# Altium PCB MainBoard_PCB_spaced.PcbDoc
Units mil, origin at the board's own origin, x right, y up, seen from the top; angles counter-clockwise.
Board outline 4850 x 3150 mil, 2 copper layers (Top Layer, Bottom Layer); 20 components, 32 nets, 91 pads, 0 vias.
Unrouted connection lines stored in the file: 2.
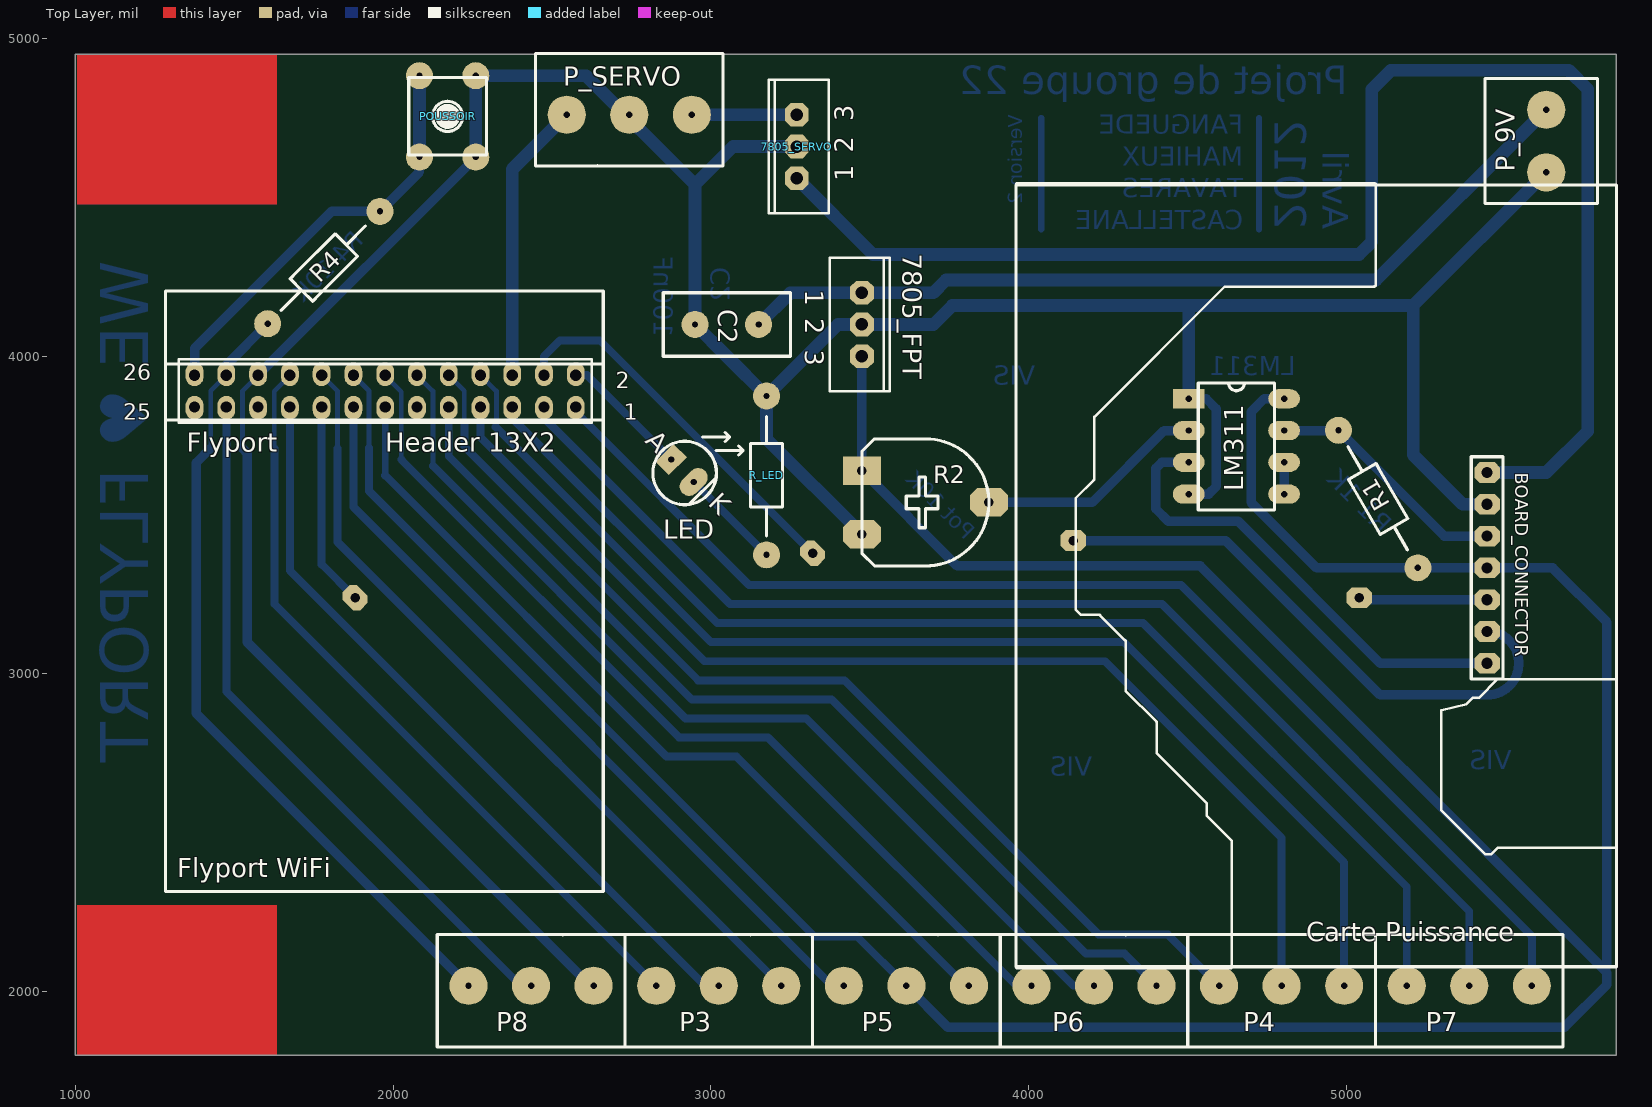
[diagram p0: Top Layer view]
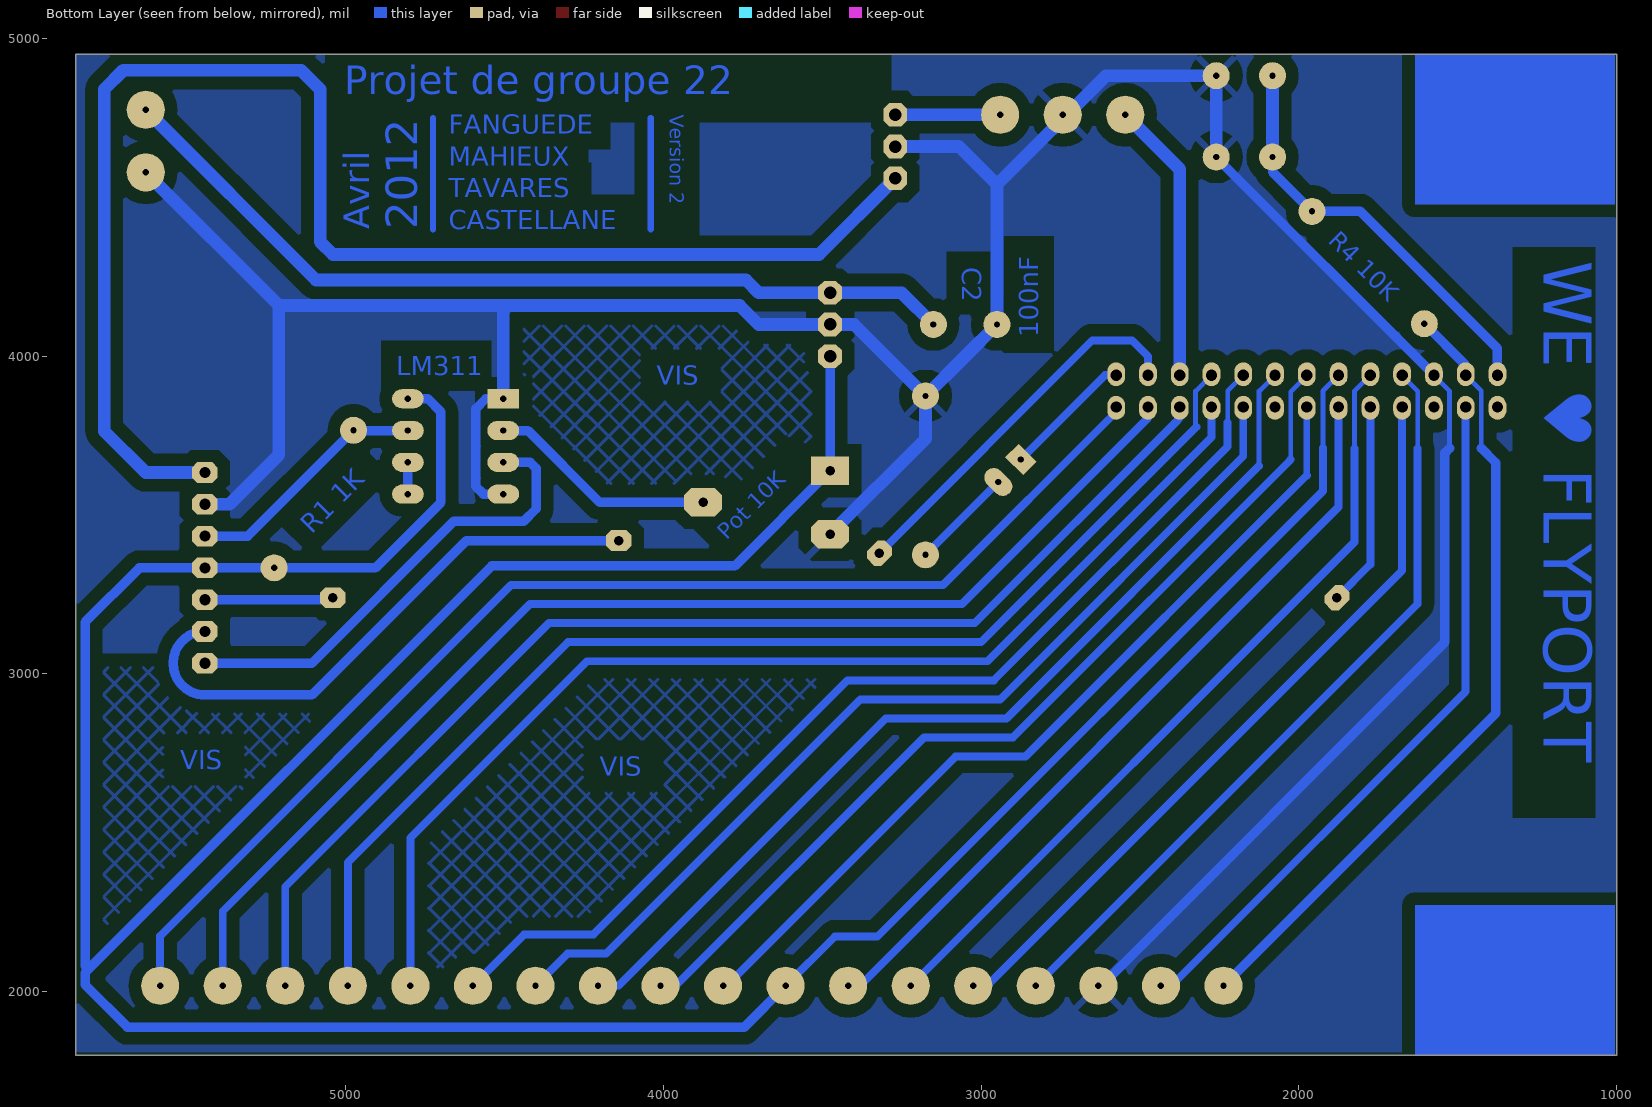
[diagram p1: Bottom Layer view, seen from below]

## Layer stack, top to bottom
Top Layer: signal copper 1.4
Dielectric: dielectric 12.6, FR-4, Dk 4.8
Bottom Layer: signal copper 1.4

## Board outline
1000,4950 5850,4950 5850,1800 1000,1800

## Design rules (kind name [scope] priority, off if disabled: settings)
Clearance [All] p1: gap=12
PlaneConnect [All] p1: planeconnectstyle=Relief reliefexpansion=20 reliefentries=4 reliefconductorwidth=20 reliefairgap=10
PolygonConnect [All] p1: connectstyle=Relief reliefconductorwidth=20 reliefentries=4 polygonreliefangle="45 Angle"
RoutingVias [All] p1: holewidth=20 width=60 viastyle="Through Hole" minholewidth=20 minwidth=60 maxholewidth=20 maxwidth=60
SilkscreenOverComponentPads [All] p1: minsilkscreentomaskgap=10
SolderMaskExpansion [All] p1: expansion=4
Width [All] p1: maxlimit=40 minlimit=15 preferedwidth=20
26 further rules are at their usual default settings.

## Components (designator, comment, footprint, x,y, rotation, side; value= is the part's Value field where it differs from the comment)
7805_FPT "Régulateur de tension 5V (Flyport)" TO-220-AB 3475,4100 r270 top
7805_SERVO "Régulateur de tension 5V (Servomoteur)" TO-220-AB 3270,4660 r90 top
BOARD_CONNECTOR "Connexion carte de puissance" HDR1X7 5442.91,3633.86 r270 top
C2 "Cap2" CAPA2 3150,4100 r180 top
Flyport "Header 13X2" HDR2X13 2574.8,3840.55 r180 top
LED "Led" LED 2875,3675 r315 top
LM311 "Comparateur de tension" DIP8 4503.94,3866.14 r0 top
P3 "Bornier_3" Bornier_3 2729.33,2018.7 r0 top
P4 "Bornier_3" Bornier_3 4500.98,2018.7 r0 top
P5 "Bornier_3" Bornier_3 3319.88,2018.7 r0 top
P6 "Bornier_3" Bornier_3 3910.43,2018.7 r0 top
P7 "Bornier_3" Bornier_3 5091.53,2018.7 r0 top
P8 "Bornier_3" Bornier_3 2138.78,2018.7 r0 top
P_9V "Bornier Pile 9V" Bornier_2 5628.94,4874.01 r270 top
P_SERVO "Bornier Servomoteur" Bornier_3 3038.39,4760 r180 top
POUSSOIR "SW-PB" SW_BP 2171.26,4754.92 r270 top
R1 "Res2" res5_1/4W 4975,3767 r300 top
R2 "RPot" AJUSTABLE 3475,3640 r270 top
R4 "Res2" res5_1/4W 1604.92,4102.36 r45 top
R_LED "" res5_1/4W 3175,3375 r90 top

## Footprints (in the part's own frame and the unit in brackets; to place one, negate y for a bottom-side part, rotate by r counter-clockwise, add the part's x,y. Pads: shape width x height; smd on the part's side, far side on the other; paste and mask are expansions set on the pad)
AJUSTABLE [mil]
  rect 90x120 hole 30: 1(0,0)
  oct 90x120 hole 30: 2(100,400) 3(200,0)
  silkscreen extent -100,0 300,400
Bornier_2 [mil]
  round 120 hole 20: 1(98.43,0) 2(295.28,0)
  silkscreen extent 0,-193 394,161
Bornier_3 [mil]
  round 120 hole 20: 1(98.43,0) 2(295.28,0) 3(492.13,0)
  silkscreen extent 0,-193 591,161
CAPA2 [mil]
  round 85 hole 20: 1(0,0) 2(200,0)
  silkscreen extent -100,-100 300,100
DIP8 [mil]
  rect 100x60 hole 20: 1(0,0)
  oval 100x60 hole 20: 2(0,-100) 3(0,-200) 4(0,-300) 5(300,-300) 6(300,-200) 7(300,-100) 8(300,0)
  silkscreen extent 30,-350 270,50
HDR1X7 [mil] "Connector; Header; 7 Position"
  oct 65x80 hole 35.43: 1(0,0) 2(100,0) 3(200,0) 4(300,0) 5(400,0) 6(500,0) 7(600,0)
  silkscreen extent -50,-50 650,50
HDR2X13 [mil] "Connector; Header; 13x2 Position"
  oval 56x75 hole 35.43 copper offset 0,3: 1(0,0) 3(100,0) 5(200,0) 7(300,0) 9(400,0) 11(500,0) 13(600,0) 15(700,0) 17(800,0) 19(900,0) 21(1000,0) 23(1100,0) 25(1200,0)
  oval 56x75 hole 35.43 copper offset 0,-3: 2(0,-100) 4(100,-100) 6(200,-100) 8(300,-100) 10(400,-100) 12(500,-100) 14(600,-100) 16(700,-100) 18(800,-100) 20(900,-100) 22(1000,-100) 24(1100,-100) 26(1200,-100)
  silkscreen extent -50,-150 1250,50
LED [mil]
  rect 60x80 hole 20: 1(0,0)
  oval 60x100 hole 20: 2(100,0)
  silkscreen extent -40,-100 160,180
res5_1/4W [mil]
  round 85 hole 20: 1(0,0) 2(500,0)
  silkscreen extent 60,-50 435,50
SW_BP [mil]
  round 85 hole 20: 1(-127.95,88.58) 2(127.95,88.58) 3(-127.95,-88.58) 4(127.95,-88.58)
  silkscreen extent -122,-122 122,122
TO-220-AB [mm] "TO, Thru-Hole, Vertical, Heatsink Mounted; 3 In-Line Leads; Pitch 2.54 mm"
  oct 1.905x1.905 hole 1: 1(-2.54,0) 2(0,0) 3(2.54,0)
  silkscreen extent -5.35,-2.55 5.35,2.25

## Part data
7805_FPT 7805_SERVO: library part SCR, "Silicon Controlled Rectifier"
BOARD_CONNECTOR: library part "Header 7", "Header, 7-Pin"
C2: "Capacitor"
Flyport: "Header, 13-Pin, Dual row"
LED: "LED"
LM311: library part LM311N, "Voltage Comparator"
P3 P4 P5 P6 P7 P8: "Header, 3-Pin"
P_9V: library part Bornier_2, "Header, 2-Pin"
P_SERVO: library part Bornier_3, "Header, 3-Pin"
POUSSOIR: "Switch"
R1 R4: "Resistor"
R2: "Potentiometer"
R_LED: library part Res2, "Resistor"

## Free pads (board coordinates)
  oct 65x80 hole 30 rot 45: 2(3320,3380) 5(1880,3240)
  oct 80x65 hole 30: 3(4140,3420) 4(5040,3240)

## Nets (pads, with @x,y where several pads share a name; then routed paths per layer and width w, separated by ;. In a path a pad name is that pad's centre, name@x,y a point inside that pad or via, vN(x,y) a via of type N, cw(c..) or ccw(c..) an arc to the next point about the centre after c; other vN are vias at no path point)
3V3FLYPORT: Flyport.24 P8.1 R4.1 | length 2531.9
  Bottom Layer w15: 1425.78,3710.63 1425.78,3891.52 Flyport.24
  Bottom Layer w25: Flyport.24 Flyport.24@1474.8,3972.24
  Bottom Layer w30: 1425.78,3710.63 1380,3664.85 1380,2875.9 P8.1 ; Flyport.24@1474.8,3972.24 R4.1
AN1_23: Flyport.23 P8.2 | length 2238.4
  Bottom Layer w25: Flyport.23 1474.8,2945.2 2401.3,2018.7 P8.2
AN4_18: Flyport.18 P3.3 | length 2521.1
  Bottom Layer w15: Flyport.18 1824.8,3890.55 1824.8,3710.28
  Bottom Layer w25: 1824.8,3710.28 1824.8,3415.35 P3.3
AN5_20: Flyport.20 P3.1 | length 2481.4
  Bottom Layer w15: 1625.78,3710.28 1625.78,3889.58 1674.8,3938.61 Flyport.20 ; P3.1 P3.1@2827.76,2060.04
  Bottom Layer w25: 1625.78,3710.28 1625.78,3220.68 P3.1
BOARD_LED: Flyport.21
CURRENT_SENSE: BOARD_CONNECTOR.7 LM311.3 | length 1483.2
  Bottom Layer w30: LM311.3 4419.09,3666.14 4400,3647.05 4400,3520 4440,3480 4660,3480 5106.14,3033.86 BOARD_CONNECTOR.7
EN: BOARD_CONNECTOR.3 LM311.7 R1.1 | length 777.3
  Bottom Layer w20: BOARD_CONNECTOR.3@5442.77,3434 BOARD_CONNECTOR.3
  Bottom Layer w25: R1.1@4974.14,3766.14 R1.1
  Bottom Layer w30: LM311.7 R1.1@4974.14,3766.14 ; R1.1 5308,3434 BOARD_CONNECTOR.3@5442.77,3434
GND: 7805_FPT.2 7805_SERVO.2 BOARD_CONNECTOR.2 C2.2 Flyport.22 LM311.1 LM311.4 P8.3 P_9V.2 P_SERVO.2 POUSSOIR.1 POUSSOIR.2 R2.3 R_LED.2 | length 10357.8
  Bottom Layer w15: 1525.78,3710.28 1525.78,3891.52 Flyport.22
  Bottom Layer w20: POUSSOIR.2 POUSSOIR.2@2260.53,4626.28
  Bottom Layer w30: 1525.59,3710.28 1540,3695.88 1540,3100 P8.3@2626.1,2013.9 ; Flyport.22 POUSSOIR.2@2260.53,4626.28 ; LM311.4 4566.14,3566.14 4590.55,3590.55 4590.55,3834.45 4558.86,3866.14 ; BOARD_CONNECTOR.2@5426.14,3533.86 BOARD_CONNECTOR.2
  Bottom Layer w40: POUSSOIR.2 POUSSOIR.1 2607.28,4882.87 2950,4540.16 ; 7805_SERVO.2 3069.84,4660 2950,4540.16 ; R2.3 3175,3740 R_LED.2 ; LM311.1 4503.94,4160 ; BOARD_CONNECTOR.2 5366.14,3533.86 5210.2,3689.8 5210.2,4160 ; P_9V.2 5210.2,4160 ; 2950,4540.16 C2.2 3050,4000 R_LED.2 ; R_LED.2 3400,4100 7805_FPT.2 3700,4100 3760,4160 4503.94,4160 ; 4503.94,4160 5210.2,4160
I2C_CLK: Flyport.1 P7.3 | length 3864.4
  Bottom Layer w25: Flyport.1 2574.8,3825.2 3120,3280 4479.21,3280 5583.66,2175.55 P7.3
I2C_DATA: Flyport.3 P7.2 | length 3824.7
  Bottom Layer w25: Flyport.3 2474.8,3805.2 3060,3220 4420,3220 5386.81,2253.19 P7.2
IN1: Flyport.5 P7.1 | length 3772.9
  Bottom Layer w25: Flyport.5 2374.8,3805.47 2388.48,3791.8 2388.48,3791.52 3020,3160 4360,3160 5189.96,2330.04 P7.1
IN2: Flyport.7 P4.2 | length 3604.4
  Bottom Layer w25: Flyport.7 2274.8,3745.2 2980,3040 4240,3040 4796.26,2483.74 P4.2
IN3: Flyport.9 P6.3 | length 3073.4
  Bottom Layer w25: Flyport.9 2174.8,3685.2 2940,2920 3380,2920 4180,2120 4301.26,2120 P6.3
LED_OUTPUT: Flyport.2 LED.1 | length 410.2
  Bottom Layer w25: Flyport.2 2609.45,3940.55 LED.1
NetLED_2: LED.2 R_LED.1 | length 324.3
  Bottom Layer w25: LED.2 R_LED.1
NetLM311_2: LM311.2 R2.2 | length 722.6
  Bottom Layer w30: R2.2 4147.71,3540 4200,3540 4426.14,3766.14 LM311.2
NetLM311_5: LM311.5 LM311.6 | length 100
  Bottom Layer w30: LM311.5 LM311.6
OUT3_PWM: Flyport.19 P3.2 | length 2406.3
  Bottom Layer w25: Flyport.19 1674.8,3325.2 2981.3,2018.7 P3.2
PWM1: BOARD_CONNECTOR.6 Flyport.4 pad.2 pad.3 | length 3021.2
  Bottom Layer w25: Flyport.4 2474.8,3999.8 2525,4050 2650,4050 pad.2
  Bottom Layer w30: pad.3 4620,3420 5106.14,2933.86 5442.91,2933.86 ccw(c5442.91,3033.86) BOARD_CONNECTOR.6
PWM2: BOARD_CONNECTOR.5 Flyport.17 pad.4 pad.5 | length 1049.6
  Bottom Layer w25: Flyport.17 1774.8,3345.2 pad.5
  Bottom Layer w30: pad.4 5046.14,3233.86 BOARD_CONNECTOR.5
PWM_SERVO: Flyport.6 P_SERVO.3 | length 890.5
  Bottom Layer w40: Flyport.6 2374.8,4588.54 P_SERVO.3
RST_B: Flyport.26 POUSSOIR.3 POUSSOIR.4 R4.2 | length 1324.9
  Bottom Layer w30: Flyport.26 1374.8,4024.8 1805.92,4455.92 R4.2 2082.68,4580.12 POUSSOIR.4
  Bottom Layer w40: POUSSOIR.4 POUSSOIR.3
RX: Flyport.13 P5.3 | length 2760.8
  Bottom Layer w15: P5.3@3796.66,2018.7 P5.3
  Bottom Layer w20: 1974.8,3625.2 Flyport.13
  Bottom Layer w25: 1974.8,3625.2 2860,2740 3080,2740 3800,2020 P5.3@3800,1980
SPI_CLK_8: Flyport.8 P4.3 | length 3807.9
  Bottom Layer w15: Flyport.8 2325,3890.36 2325,3780
  Bottom Layer w25: 2322.5,3777.5 3000,3100 4300,3100 4993.11,2406.89 P4.3
SPI_CS_14: Flyport.14 P6.1 | length 2963.4
  Bottom Layer w15: Flyport.14 1974.8,3938.61 2025.59,3887.82 2025.59,3674.41
  Bottom Layer w25: 2025.59,3674.41 2900,2800 3180,2800 P6.1@4000,1980
SPI_IN_12: Flyport.12 P6.2 | length 3064.8
  Bottom Layer w15: Flyport.12 2125,3890.36 2125,3655
  Bottom Layer w25: 2125,3655 2920,2860 3300,2860 4141.3,2018.7 P6.2
SPI_OUT_10: Flyport.10 P4.1 | length 3323.4
  Bottom Layer w15: Flyport.10 2223.83,3891.52 2223.83,3790.93
  Bottom Layer w25: 2223.83,3790.93 2223.83,3716.17 2960,2980 3420.51,2980 4220.39,2180.12 4437.99,2180.12 P4.1
TX: Flyport.15 P5.1 | length 2522.9
  Bottom Layer w25: Flyport.15 1874.8,3525.2 P5.1@3381.3,2018.7 ; P5.1@3418.31,2021.69 P5.1 ; P5.1@3381.3,2018.7 P5.1 ; P5.1@3381.3,2018.7 P5.1
V_5V_FPT: 7805_FPT.3 BOARD_CONNECTOR.4 Flyport.16 LM311.8 P5.2 R1.2 R2.1 | length 11197.7
  Bottom Layer w16: Flyport.16 1924.21,3891.14 1924.21,3710.63
  Bottom Layer w25: 1924.21,3710.63 1924.21,3575.79 3326.77,2173.23 3460.63,2173.23 P5.2
  Bottom Layer w30: 7805_FPT.3 R2.1 3775,3340 4540,3340 5820,2060 5820,2021.77 5687.01,1888.78 3745.08,1888.78 P5.2 ; LM311.8 4741.14,3866.14 4700,3825 4700,3540 4906.08,3333.92 5442.85,3333.92 BOARD_CONNECTOR.4 5649.13,3333.86 5820,3162.99 5820,2080
V_5V_SERVO: 7805_SERVO.3 P_SERVO.1 | length 330
  Bottom Layer w40: P_SERVO.1 7805_SERVO.3
V_9V: 7805_FPT.1 C2.1 P_9V.1 | length 2758.8
  Bottom Layer w40: C2.1 3250,4200 7805_FPT.1 3700,4200 3740,4240 5093.35,4240 P_9V.1
V_BAT: 7805_SERVO.1 BOARD_CONNECTOR.1 | length 4582.1
  Bottom Layer w40: 7805_SERVO.1 3510,4320 5040,4320 5080,4360 5080,4840 5140,4900 5700,4900 5760,4840 5760,3764.92 5628.94,3633.86 BOARD_CONNECTOR.1
pads on no net: Flyport.11 Flyport.25
copper on no net: | length 700
  Bottom Layer w20: 4040,4400 4040,4750 ; 4725,4400 4725,4750

## Polygon pours and split planes (outlines as drawn)
no net on Top Overlay "Bottom Layer-No Net" (none): 3960.51,2078.74 ccw(c3965.53,2078.74) 3965.53,2073.73 4634.82,2073.73 ccw(c4634.82,2078.74) 4639.83,2078.74 4639.83,2472.44 ccw(c4634.82,2472.44) 4638.35,2476 4638.36,2475.99 4561.09,2553.26 4561.09,2590.55 ccw(c4556.08,2590.55) 4559.61,2594.11 4559.62,2594.1 4403.61,2750.11 4403.61,2846.46 ccw(c4398.6,2846.46) 4402.13,2850.02 4402.14,2850 4305.19,2946.96 4305.19,3102.36 ccw(c4300.17,3102.36) 4303.7,3105.93 4303.72,3105.91 4224.98,3184.65 4225,3184.63 ccw(c4221.43,3181.1) 4221.43,3186.12 4164.45,3186.12 4147.71,3202.86 4147.71,3553.04 4205.29,3610.63 4205.28,3610.61 ccw(c4201.75,3614.17) 4206.76,3614.17 4206.76,3808.95 4617.21,4219.39 5087.57,4219.39 ccw(c5087.57,4224.41) 5092.59,4224.41 5092.59,4539.37 ccw(c5087.57,4539.37) 5087.57,4544.39 3965.53,4544.39 ccw(c3965.53,4539.37) 3960.51,4539.37
no net on Top Overlay "Bottom Layer-No Net" (none): 5299.09,2570.47 5299.09,2885.43 5377.83,2905.12 5397.52,2924.8 5417.2,2924.8 5476.26,2983.86 5850.28,2983.86 5850.28,2452.36 5476.26,2452.36 5456.57,2432.68 5436.89,2432.68
no net on Bottom Layer "Bottom Layer-GND" (hatched 45Degree grid 50 track 10, remove dead copper, pour order 8): 3430,3020 4240,3020 4780,2480 4780,2470 4780,2090 4768.11,2078.11 4540,2078.11 4440,2178.11 4431.89,2170 4220,2170 3430,2960 3430,2970.51
no net on Bottom Layer "Bottom Layer-GND" (hatched 45Degree grid 50 track 10, remove dead copper, pour order 16): 5280,2933.86 5286.14,2940 5470,2940 5540,3010 5540,3020 5820,3020 5820,2420 5820,2060 5100,2780 5090,2780 5090,2770 5106.14,2786.14 5106.14,2933.86
no net on Bottom Layer "Bottom Layer-GND" (hatched 45Degree grid 50 track 10, remove dead copper, pour order 18): 4500,4160 4503.94,4156.06 4503.94,3766.14 4426.14,3766.14 4200,3540 3880,3540 3730,3390 3725,3390 3470,3645 3470,3650 3470,4100 3690,4100 3750,4160 3760,4160
GND on Bottom Layer "Bottom Layer-GND" (solid, pour order 20): 1000,4950 5850,4950 5850,1800 5840,1810 1000,1810

## Other copper
Bottom Layer:
  text "Projet de groupe 22" at 5005,4825 h90
  text "Version 2" at 3980,4760 h44 r90
  text "FANGUEDE" at 4675,4700 h60
  text "MAHIEUX" at 4675,4600 h60
  text "TAVARES" at 4675,4500 h60
  text "CASTELLANE" at 4675,4400 h60
  text "2012" at 4775,4400 h100 r270
  text "Avril" at 4925,4400 h80 r270
  text "R4 10K" at 1910,4360 h55 r45
  text "WE ♥ FLYPORT" at 1280,4300 h260 r90
  text "C2" at 3060,4280 h60 r90
  text "100nF" at 2820,4060 h60 r270
  text "LM311" at 4840,3940 h60
  text "VIS" at 4020,3910 h60
  text "R1 1K" at 5106.7,3438.89 h60 r315
  text "Pot 10K" at 3800,3420 h50 r315
  text "VIS" at 5520,2700 h60
  text "VIS" at 4200,2680 h60
Multi-Layer:
  rectangle: 1004.92,1800.4 1634.84,2272.64
  rectangle: 1004.92,4477.56 1634.84,4949.81

## Silkscreen, mask and mechanical layers (free items; w line width, h text height)
Top Overlay:
  lines w10: 1283,3798.98 2660.95,3798.98 ; 1283,3975.98 2660.95,3975.98 ; 5492.91,3028.46 5492.91,3683.86 ; 5492.91,3683.86 5392.91,3683.86 5392.91,2983.86 5492.91,2983.86 5492.91,3683.86 ; 1283,2315.24 1283,4205 2660.95,4205 2660.95,2315.24 1283,2315.24 ; 3960.51,2078.74 3960.51,4539.37 5850.28,4539.37 5850.28,2078.74 3960.51,2078.74
  text "Flyport WiFi" at 1319.88,2360.24 h60
  text "Carte Puissance" at 4873.31,2158.86 h60

## Dimensions
5850,1800 to 1000,1800 on Top Layer
5850,1800 to 5850,4950 on Top Layer

## Text inside footprints (layer, text, board x,y; h text height)
7805_FPT: Top Overlay "3" at 3296.85,4019.68 h59.06 r270; Top Overlay "2" at 3296.85,4119.69 h59.06 r270; Top Overlay "1" at 3296.85,4209.84 h59.06 r270
7805_SERVO: Top Overlay "3" at 3448.15,4740.31 h59.06 r90; Top Overlay "2" at 3448.15,4640.31 h59.06 r90; Top Overlay "1" at 3448.15,4550.16 h59.06 r90
Flyport: Top Overlay "2" at 2700,3900 h50; Top Overlay "1" at 2725,3800 h50; Top Overlay "25" at 1150,3800 h50; Top Overlay "26" at 1150,3925 h50
LED: Top Overlay "K" at 2988.14,3533.58 h60 r315; Top Overlay "A" at 2790.15,3731.57 h60 r315